# Altium PCB ESP32-with-USB_V0.1.PcbDoc (part 2 of 3)
Units mil, origin at the board's own origin, x right, y up, seen from the top; angles counter-clockwise.
Board outline 2720 x 1080 mil, 2 copper layers (TOP, BOTTOM); 64 components, 73 nets, 299 pads, 189 vias.
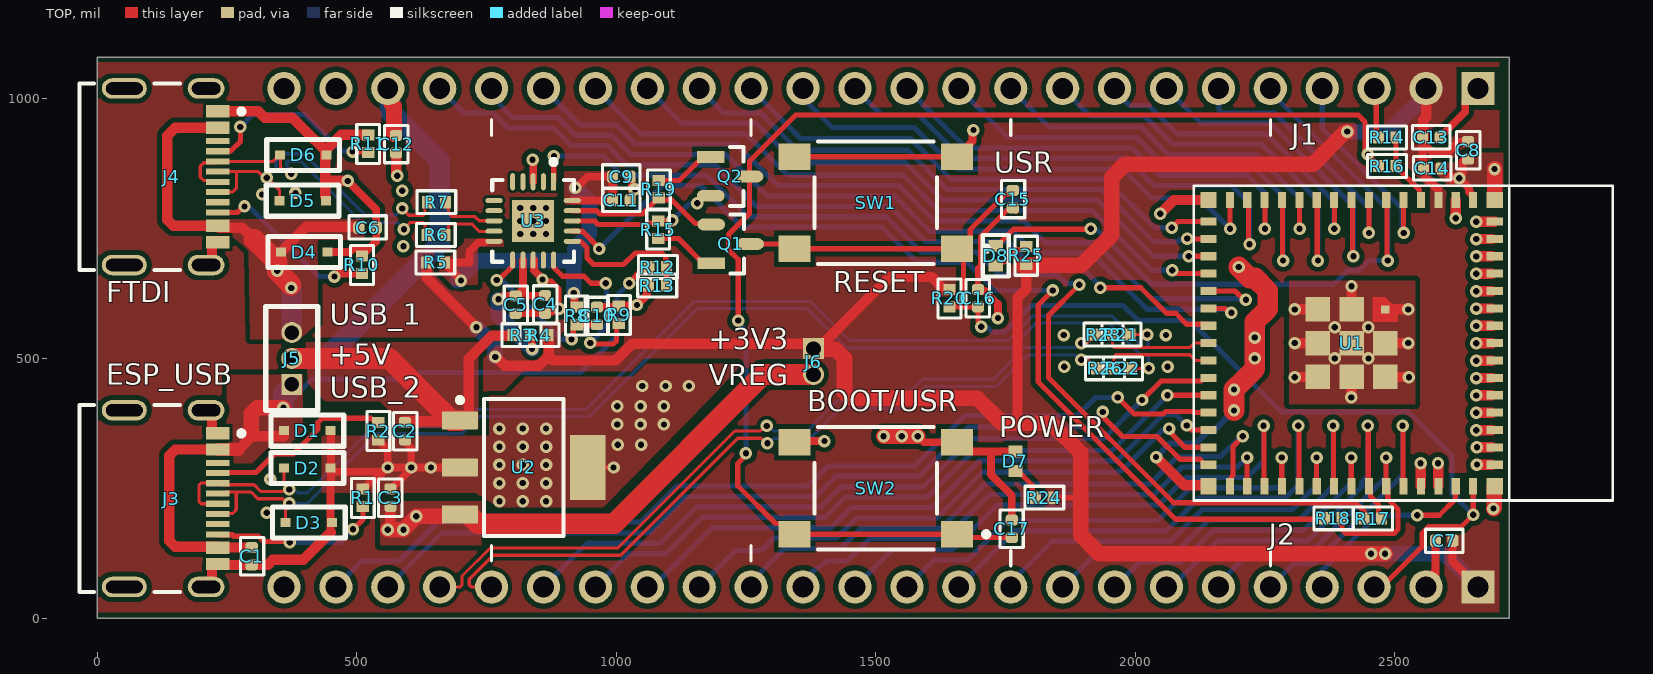
[diagram p0: TOP view]

## Via types
v1: diameter 24, hole 12, TOP to BOTTOM, tented both sides, 189 vias

## Nets (pads, with @x,y where several pads share a name; then routed paths per layer and width w, separated by ;. In a path a pad name is that pad's centre, name@x,y a point inside that pad or via, vN(x,y) a via of type N, cw(c..) or ccw(c..) an arc to the next point about the centre after c; other vN are vias at no path point) (continued)
+3V3_FTDI: C9.2 C11.2 R5.2 R8.1 U3.10 U3.20 | length 854.8
  TOP w15: R5.2@669.01,683.82 672.14,680.69 701,651.83 v1(701,650) ; R5.2@669.01,685 707.65,685 717.65,685 717.65,706.65 735,724 747,724 ; U3.20@915.73,804.68 992.76,804.68 C11.2@993.07,805 993.03,805.04 C9.2@992.99,850.14 C9.2@992.99,850.14 944.57,850.14 923.44,829 v1(921,829) ; v1(918,626) 919.72,624.28 919.72,602.14 922.85,599.01 R8.1@924,599.01
  BOTTOM w30: v1@694,650 732.1,688.1 918,688.1 ; v1(918,626) 918,688.1 ; v1(921,829) 948,802 948,739.78 919.72,711.5 919.72,688.1 918,688.1
+3V3_REG: C3.2 J6.2 U2.3 | length 1005.3
  TOP w20: v1(560,170) 560,171.08 565,176.08 C3.2@565,215
  TOP w30: v1(560,170) v1(590,170) 590,170.5 615,195.5 v1(615,196) ; v1@616.08,196 665.68,196 666.41,196.73 696.22,196.73 U2.3@698.94,199.45 701.65,196.73 U2.3@718.39,196.73
  TOP w40: U2.3@718.39,196.73 733.57,181.55 995.55,181.55 1283,469 J6.2@1380,469
+5V: C2.2 C12.2 J1.22 J5.2 R3.1 U2.1 | length 1509.4
  TOP w15: C2.2@593,376.93 C2.2@594.81,378.74
  TOP w20: J5.2@375,500 J5.2@378.83,496.17 ; C2.2@590.81,378.74 U2.1@682.2,378.74 ; 638,424.76 638,425 ; U2.1@707.95,380.55 715.67,388.27 715.67,499.67 760.06,544.06 800.35,544.06 800.98,544.69 R3.1@800.98,545
  TOP w30: J1.22@560,1020 566.51,1013.49 566.51,990.92 572,985.43 C12.2@572,932.14
  TOP w40: J5.2@375,500 563,500 638,425 682.45,380.55 U2.1@698.94,380.55
  BOTTOM w40: J5.2@375,500 439.03,500 660,720.97 660,880.33 564.59,975.73 564.59,1015.41 J1.22@560,1020
+5V_VBUS1: C1.2 D1.2 J3.A4B9 J3.B4A9 J5.1 R12.2 | length 1598.3
  TOP w10: v1(1025,645) 1025,646.65 1047.54,669.19 1057.35,669.19 1062.98,674.82 R12.2@1062.98,676
  TOP w20: J3.B4A9@232.64,135.59 230.83,137.4 150.72,137.4 139,149.12 139,312.85 150.72,324.57 J3.A4B9@232.64,324.57 ; J3.B4A9@232.98,135.93 C1.2@298,135.93 ; 272.63,324.57 298.06,350 360.06,350 ; J5.1@367.56,442.56 J5.1@375,450
  TOP w25: J3.A4B9@232.64,324.57 272.63,324.57
  TOP w30: 297,354.71 297,393.28 308.72,405 v1(359,405)
  BOTTOM w10: v1(359,405) 414,460 610,460 623,473 931.18,473 1001.31,543.13 1001.31,621.31 v1(1025,645) v1@1027.57,645
  BOTTOM w20: J5.1@360.77,435.77 J5.1@375,450
  BOTTOM w40: v1(359,405) 359,434 J5.1@360.77,435.77
+5V_VBUS2: C6.2 D4.2 J4.A4B9 J4.B4A9 J5.3 | length 882.3
  TOP w20: J4.A4B9@232.64,944.57 150.57,944.57 135,929 135,767.31 146.72,755.59 J4.B4A9@232.64,755.59 232.64,754.54 235.28,751.91 280.09,751.91 302.36,729.64 ; v1@347,670.85 347,685 347,697.88 403.12,754 C6.2@497,754 ; v1@373.23,641.68 373.23,636.77 v1(374,636)
  TOP w40: 302.36,729.64 340.56,691.44 347,685 ; v1@347,667.92 v1@373.23,641.68 ; v1(347,669) v1@347,670.85
  BOTTOM w40: v1(347,669) v1@374,642 ; v1(374,636) 375,635 J5.3@375,550
+VCC_FTDI: C4.2 C5.2 R3.2 R4.2 U3.12 | length 318.1
  TOP w15: v1(773,614) 775.44,614 781.72,620.29 805.91,620.29 806.4,620.78 C5.2@807.59,620.78 ; U3.12@820.31,689.59 820.31,633.51 C5.2@807.59,620.78 ; R4.2@835,545 838,542 v1(838,518) ; C4.2@863,620.93 862.85,620.78 C5.2@807.59,620.78
  BOTTOM w30: v1(773,614) 773,583 v1(838,518)
BTN_GPIO0: C17.2 Q2.3 R16.1 SW2.1 SW2.2 | length 2554.6
  TOP w10: v1(1235,573) 1235,690.39 1216.13,709.26 1216.13,738.54 1256.85,779.25 Q2.3@1256.85,850.6 1256.85,880.03 1345.82,969 2429.26,969 2442.59,955.68 2442.59,902.2 2448,896.79 v1(2448,893) ; v1(1249.79,317.32) 1249.79,313.53 1234,297.74 1234,254.95 1306.94,182.01 1322.91,182.01 SW2.2@1343.5,161.42 SW2.1@1656.5,161.42 1662.84,155.07 C17.2@1762,155.07 ; v1@2448,892.14 2468.22,871.93 R16.1@2468.22,870.75
  BOTTOM w10: v1(1235,573) 1235,569.21 1249.79,554.42 v1(1249.79,317.32)
CHIP_PU: C15.2 C16.2 J2.3 Q1.3 R20.1 SW1.1 SW1.2 U1.45 | length 2298.7
  TOP w10: Q1.3@1257.85,720.6 1334.32,720.6 SW1.2@1343.5,711.42 SW1.1@1656.5,711.42 ; R20.1@1642,598.99 R20.1@1642,598.99 ; v1(1703,561) 1703,564.79 1697,570.79 C16.2@1697,599.07 1696.96,599.03 R20.1@1642,598.99 ; C15.2@1764,823.93 1762.48,823.93 1754.25,815.7 1749.28,815.7 1682.01,748.43 1682.01,732.01 1661.42,711.42 SW1.1@1656.5,711.42 ; J2.3@2460,60 2474.61,60 2490.35,75.73 2490.73,75.73 2552.51,137.51 2552.51,163.72 2564.6,175.81 2627.81,175.81 v1(2651,199) 2650.83,199.17 2650.83,243.27 2650.66,243.44 U1.45@2650.66,254.02 ; R20.1@1642,598.99 1647.63,604.62 1657.27,604.62 1668.81,616.16 1668.81,699.1 SW1.1@1656.5,711.42
  BOTTOM w10: v1(1703,561) 1705.68,558.32 1716.49,558.32 1724.09,550.72 1748.28,550.72 1799.76,602.21 1976.5,602.21 2005.72,573 2105,573 2280.45,397.55 2525.86,397.55 2610,313.41 2610,240 v1(2651,199)
CON1_USB_N: D2.2 J3.A7 J3.B7 R21.1 | length 2235.8
  TOP w6.03: J3.A7@232.64,220.24 200.06,220.24 196.53,223.77 196.53,256.47 200.06,260 232.24,260 J3.B7@232.64,259.61 ; J3.B7@242,256.84 259.84,256.84 259.9,256.78 302.47,256.78 315.49,243.76 357.48,243.76 366.47,252.74 v1@370,252.74 ; D2.2@360.12,289 360.12,262.49 370,252.61 v1(370,247.74) ; R21.1@1990.02,546 v1(2023,546)
  BOTTOM w6.03: v1@370,252.74 374.86,252.74 386.61,241 405,241 532.92,368.92 696.57,368.92 729.69,402.04 942.2,402.04 1150.2,610.04 1373.96,610.04 1449.29,534.71 1754.91,534.71 1802.25,582.04 1954.62,582.04 2015.96,520.71 2020.96,520.71 2024.49,524.24 2024.49,544.51 v1(2023,546)
CON1_USB_P: D3.2 J3.A6 J3.B6 R22.1 | length 2197.2
  TOP w6.03: J3.B6@232.64,200.55 233.24,201.16 260.79,201.16 268,208.37 268,242.75 ; J3.A6@242,237.16 247.53,242.69 259.84,242.69 259.9,242.75 268,242.75 ; D3.2@363.12,184 363.12,209 370,215.88 v1(370,220.74) 366.47,220.74 357.48,229.73 309.68,229.73 296.66,242.75 268,242.75 ; R22.1@1992.99,481 v1@2017.98,481
  BOTTOM w6.03: v1(370,220.74) 369.03,221.71 369.03,226.97 375.26,220.74 404.59,220.74 538.73,354.89 702.38,354.89 735.51,388.01 948.02,388.01 1156.02,596.01 1368.14,596.01 1443.48,520.68 1760.72,520.68 1808.06,568.01 1948.81,568.01 2010.15,506.68 2020.96,506.68 2025.2,502.43 2025.2,482.16 v1(2025.98,481.39)
CON2_USB_N: D6.2 J4.A7 J4.B7 R6.1 | length 632.1
  TOP w6.03: D6.2@353.12,891.26 353.12,868.2 361.88,859.44
  TOP w6.23: J4.A7@232.64,840.24 229.97,842.9 205.4,842.9 198.89,849.41 198.89,870.43 205.4,876.94 229.97,876.94 J4.B7@232.64,879.61 338.94,879.61 D6.2@351.33,892 ; v1(591,749) 591,749.74 603.14,761.88 627.91,761.88 631.56,758.24 R6.1@631.56,746.7 ; R6.1@629.43,744.56 R6.1@635.99,738
  BOTTOM w6.23: v1(374,856) 374,860.81 365.31,869.5 365.31,880 392.19,880 510.3,761.88 578.86,761.88 591,749.74 v1(591,749)
CON2_USB_P: D5.2 J4.A6 J4.B6 R7.1 | length 642
  TOP w6.03: v1(327,847.94) 327.95,847.94 351.12,824.77 D5.2@351.12,804
  TOP w6.23: J4.B6@232.64,820.55 232.82,820.73 260.97,820.73 268.78,828.54 268.78,859.92 ; J4.A6@232.64,859.92 268.78,859.92 ; v1(327,847.94) 322.19,847.94 310.21,859.92 268.78,859.92 ; v1(588,789) 588,788.26 600.14,776.12 627.91,776.12 631.56,779.76 631.56,795.57 R7.1@636.99,801
  BOTTOM w6.23: v1(327,847.94) 344.91,865.85 344.91,879.72 359.42,894.23 398.08,894.23 516.2,776.12 575.86,776.12 588,788.26 v1(588,789)